# Altium PCB PCB2.PcbDoc
Units mm, origin at the board's own origin, x right, y up, seen from the top; angles counter-clockwise.
Board outline 90 x 77.44 mm, 2 copper layers (Top Layer, Bottom Layer); 78 components, 54 nets, 235 pads, 50 vias.
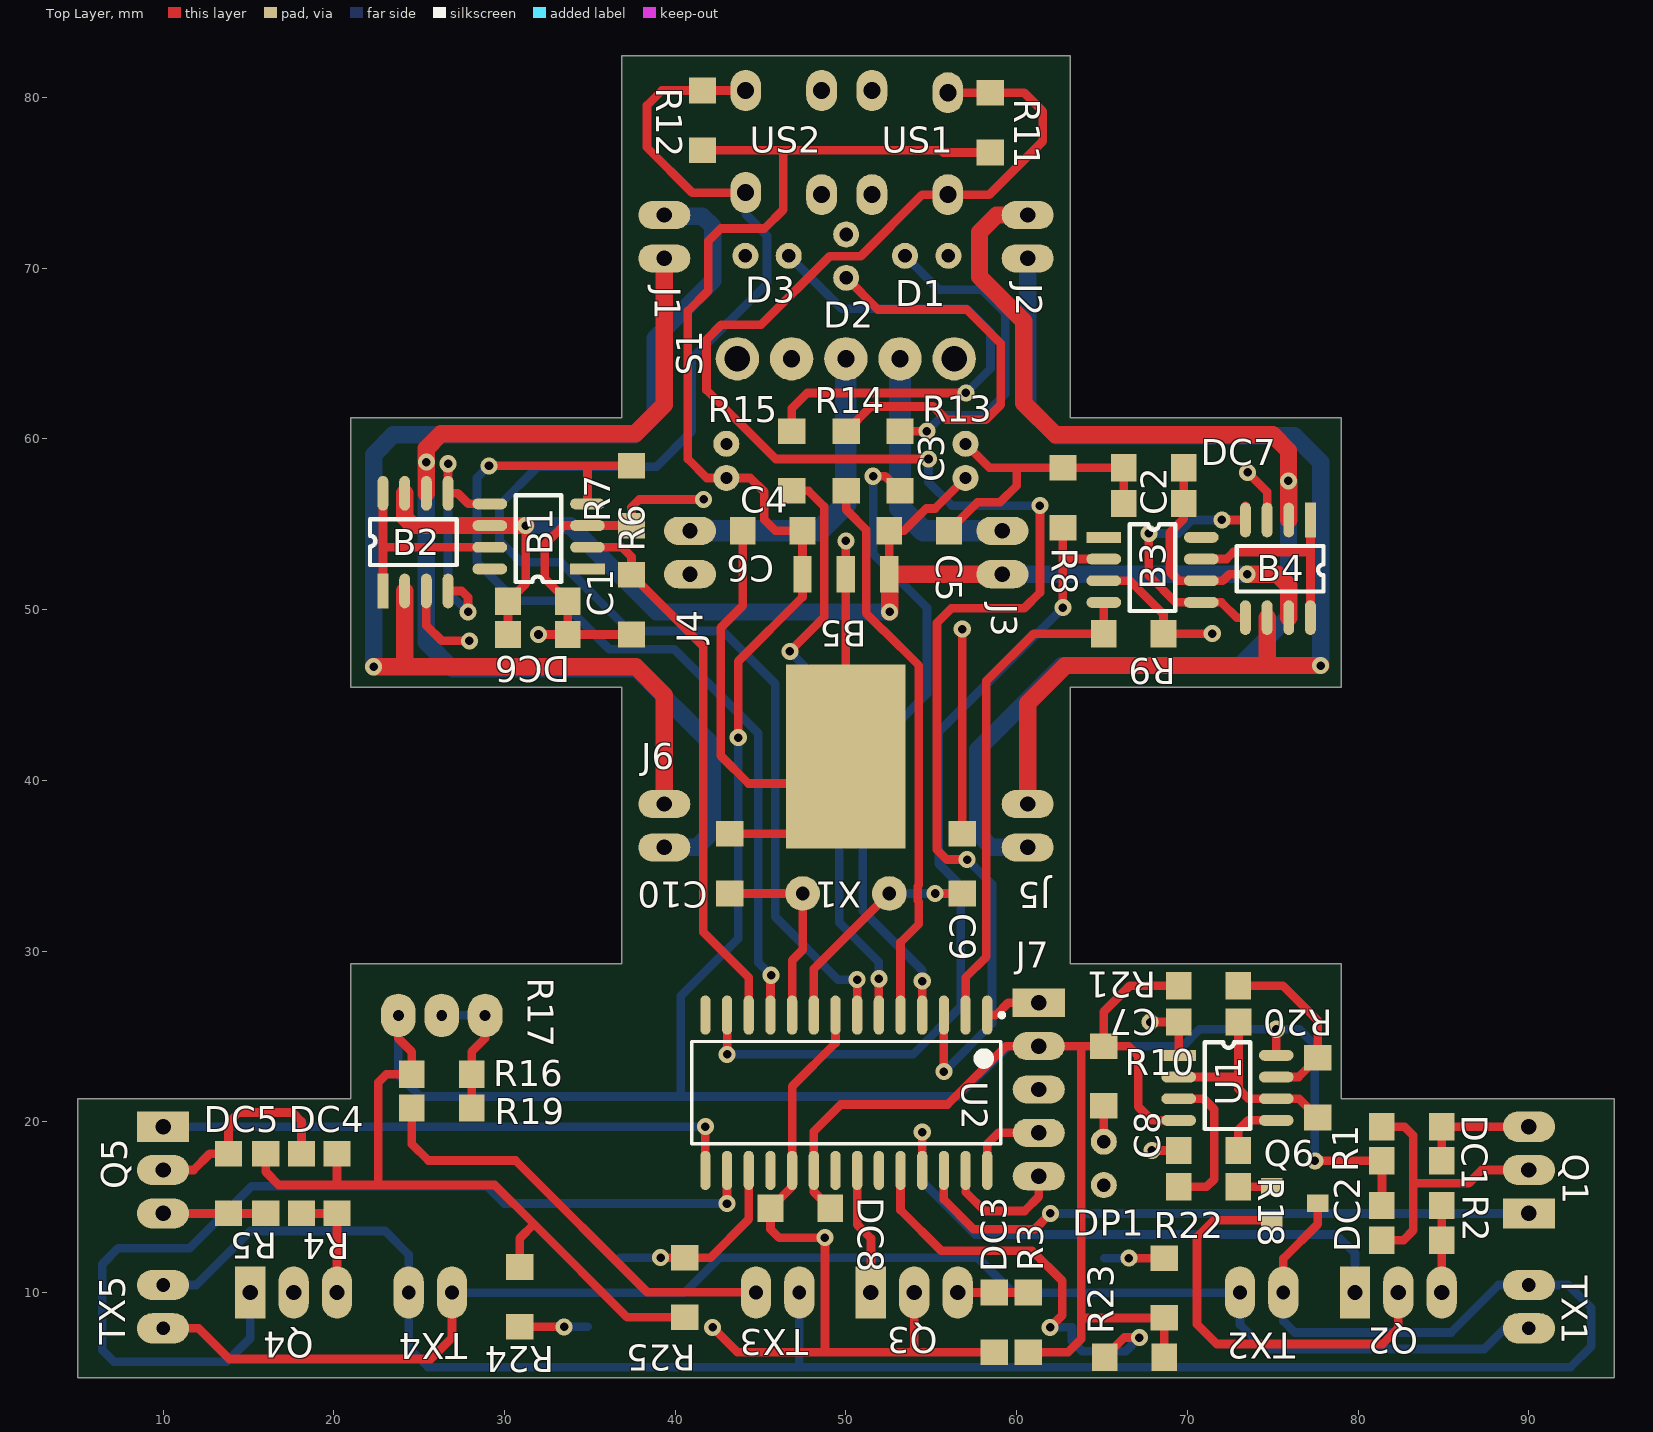
[diagram p0: Top Layer view]
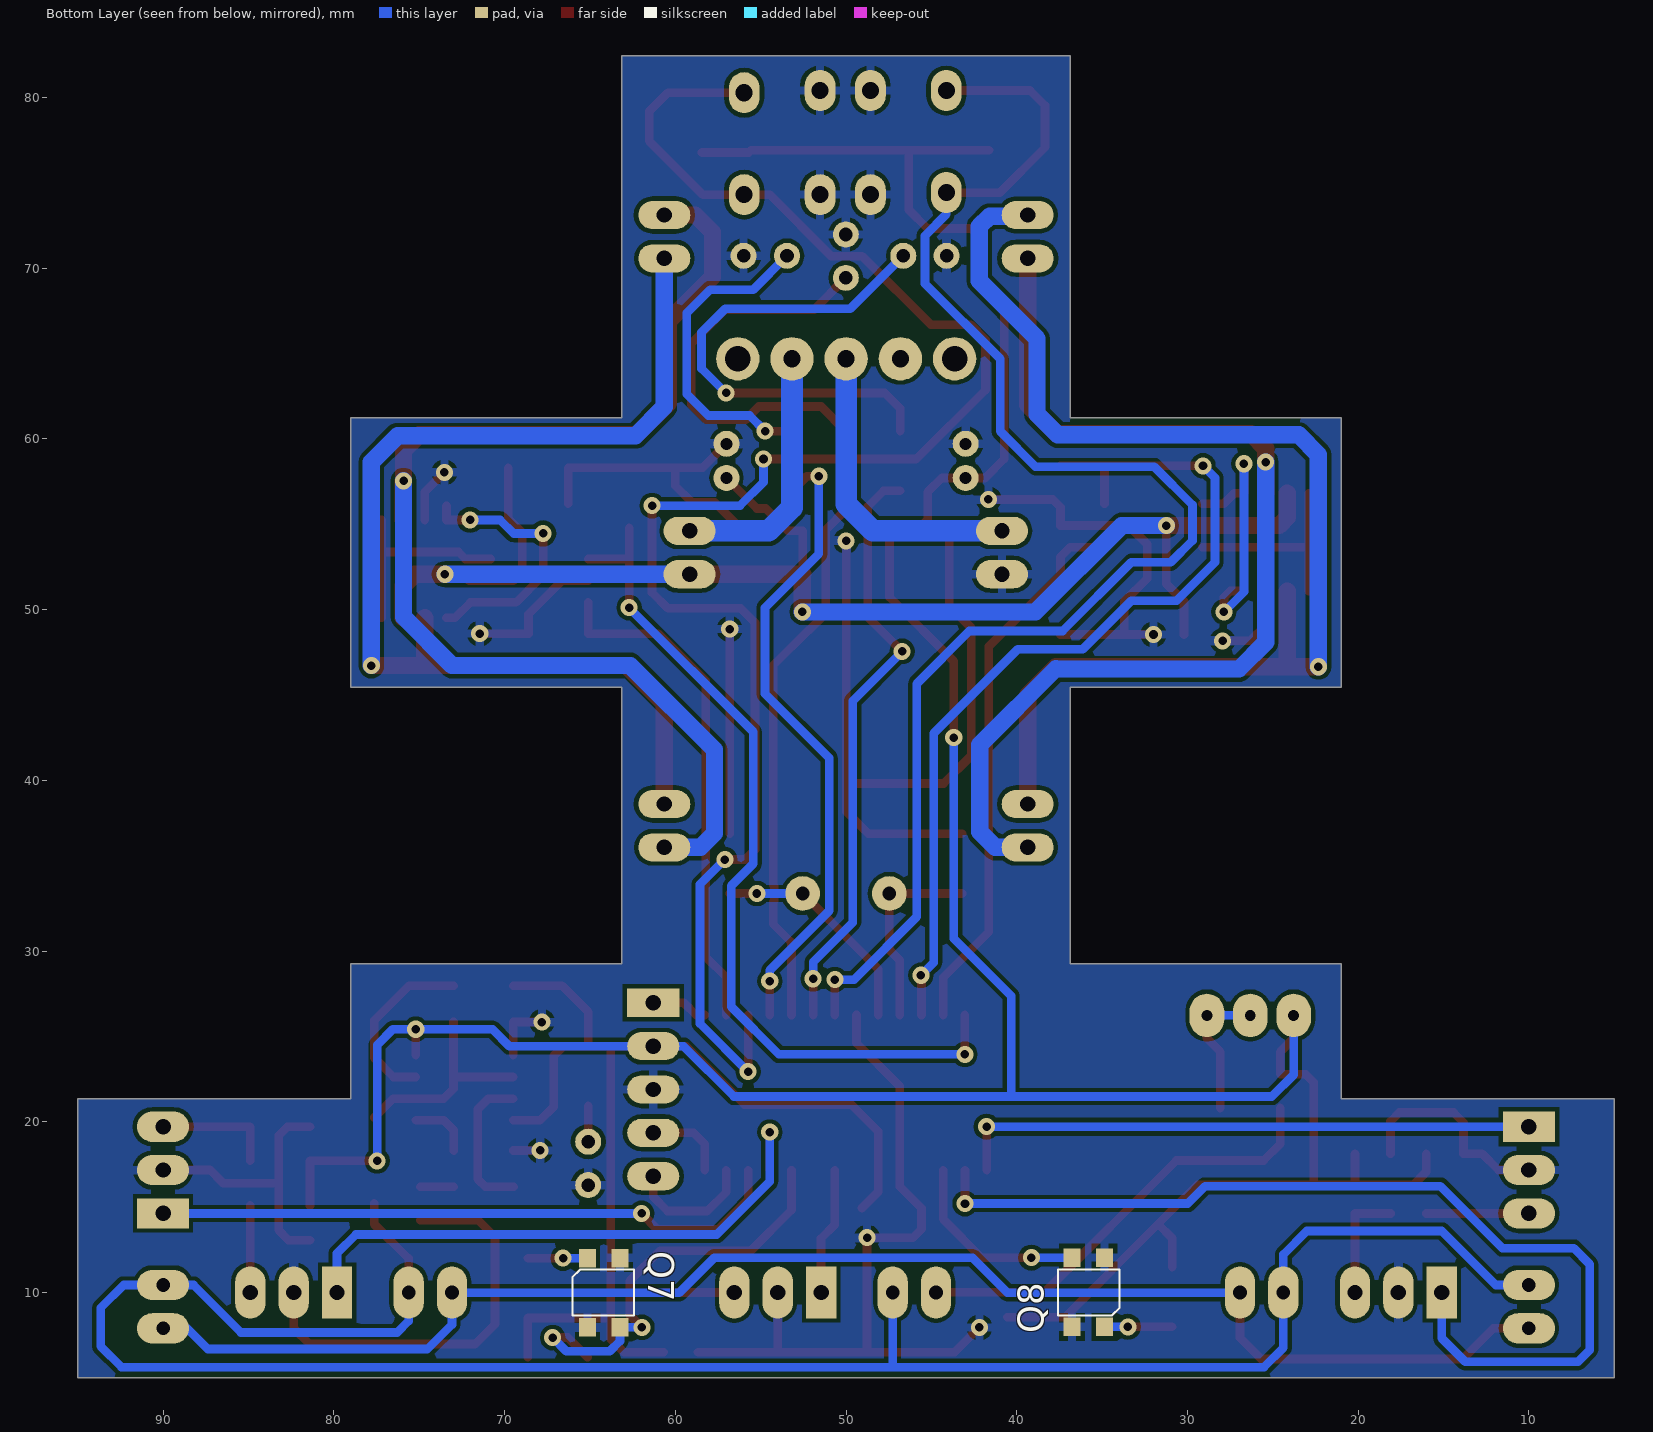
[diagram p1: Bottom Layer view, seen from below]
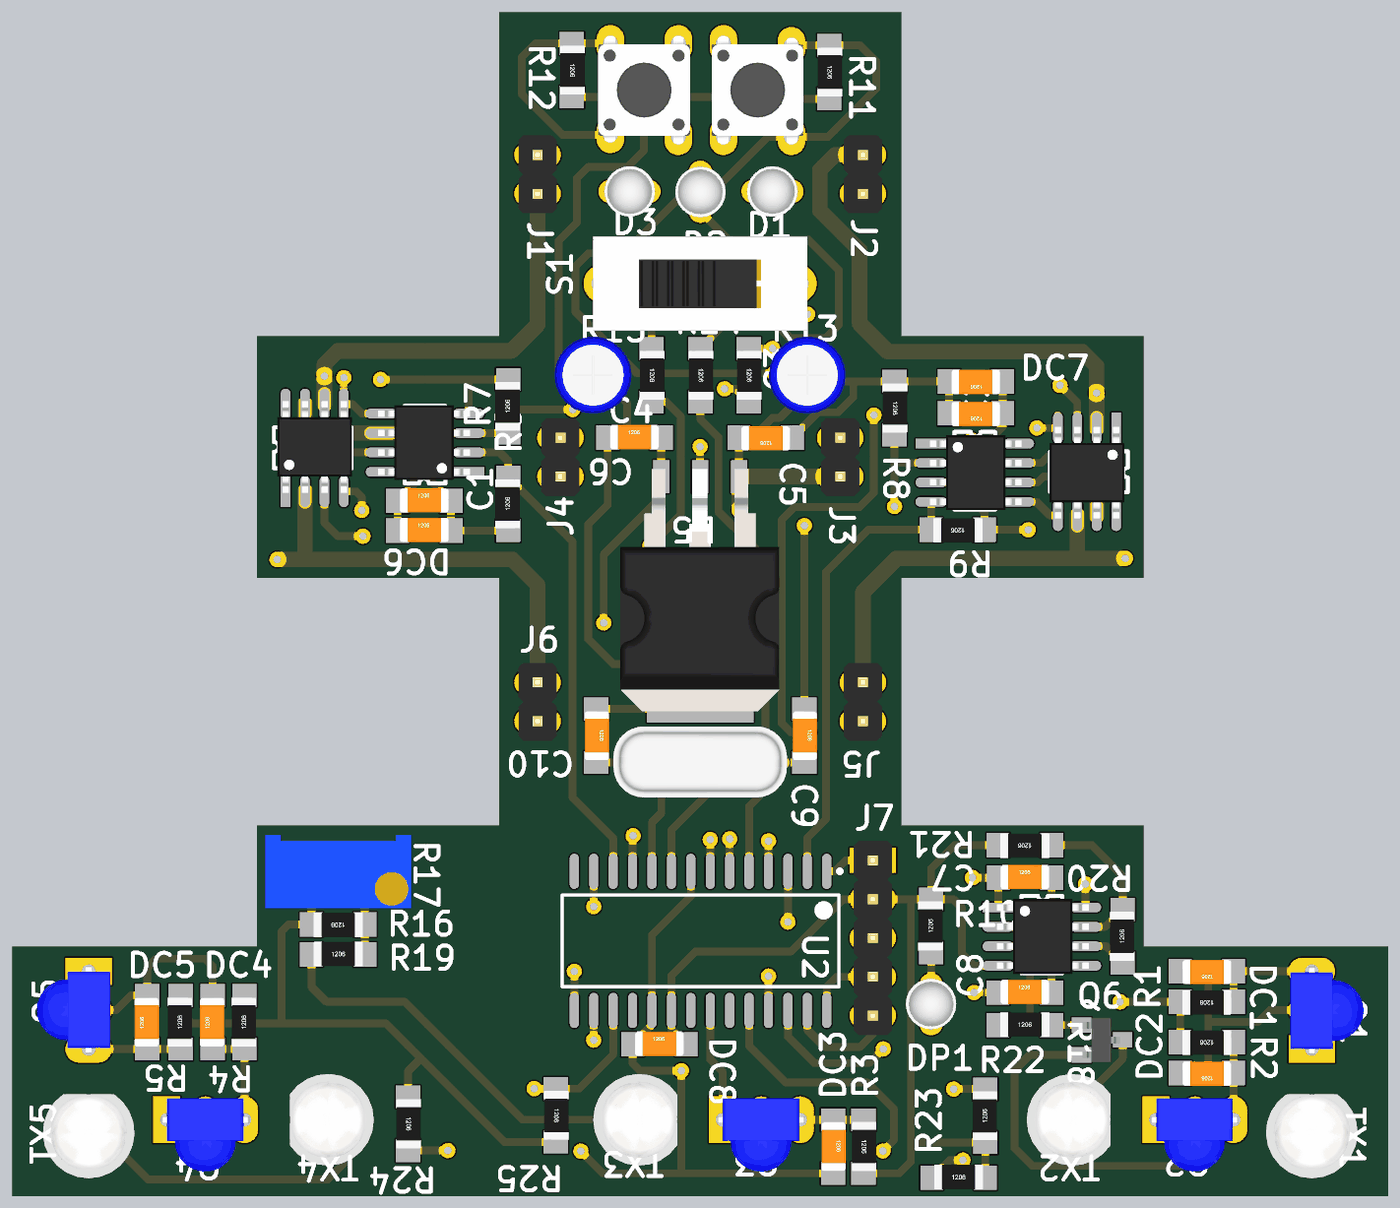
[diagram p2: 3D render of the assembled board from above, using the file's embedded part models]

## Layer stack, top to bottom
Top Solder: solder mask 0.0102, Solder Resist, Dk 3.5
Top Layer: signal copper 0.0356
Dielectric 1: dielectric 0.32, FR-4, Dk 4.8
Bottom Layer: signal copper 0.0356
Bottom Solder: solder mask 0.0102, Solder Resist, Dk 3.5

## Board outline
5,5 5,21.34 21,21.34 21,29.24 36.86,29.24 36.86,45.44 21,45.44 21,61.24 36.86,61.24 36.86,82.44 63.14,82.44 63.14,61.24 79,61.24 79,45.44 63.14,45.44 63.14,29.24 79,29.24 79,21.34 95,21.34 95,5

## Design rules (kind name [scope] priority, off if disabled: settings)
Clearance [All] p1: gap=0.254
HoleSize [All] p1: absolutevalues=TRUE maxlimit=6.3 minlimit=0.2 maxpercent=80.000 minpercent=20.000
MinimumAnnularRing [All] p1: minimumring=0.076
PlaneConnect [All] p1: planeconnectstyle=Relief reliefexpansion=0.508 reliefentries=4 reliefconductorwidth=0.508 reliefairgap=0.254
PolygonConnect [All] p1: connectstyle=Relief reliefconductorwidth=0.508 reliefentries=4 polygonreliefangle="90 Angle" airgapwidth=0.254
RoutingVias [All] p1: holewidth=0.5 width=1 viastyle="Through Hole" minholewidth=0.2 minwidth=0.45 maxholewidth=1 maxwidth=1.27
SolderMaskExpansion [All] p1: expansion=0.102
Width [All] p1: maxlimit=1.27 minlimit=0.127 preferedwidth=0.508
28 further rules are at their usual default settings.

## Components (designator, comment, footprint, x,y, rotation, side; value= is the part's Value field where it differs from the comment)
B1 "IX4427" SOIC-8 40.316,52.38 r180 top
B2 "ZXMHC3F381N8" SOIC-8 22.88,45.629 r90 top
B3 "IX4427" SOIC-8 59.639,54.23 r0 top
B4 "ZXMHC3F381N8" SOIC-8 77.205,60.706 r270 top
B5 "LM2940" TO-263 49.99,44.444 r180 top
C1 "CAP-CER" C1206 31.95,50.48 r0 top
C2 "CAP-CER" C1206 68.025,56.21 r180 top
C3 "CAP-ELEC" CAP-ELEC-5x11x2mm 57,58.71 r90 top
C4 "CAP-ELEC" CAP-ELEC-5x11x2mm 42.99,58.71 r90 top
C5 "CAP-CER" C1206 54.28,54.61 r180 top
C6 "CAP-CER" C1206 45.7,54.61 r0 top
C7 "CAP-CER" C1206 71.24,25.84 r0 top
C8 "CAP-CER" C1206 71.23,18.32 r0 top
C9 "CAP-CER" C1206 56.81,35.12 r270 top
C10 "CAP-CER" C1206 43.2,35.12 r270 top
D1 "LED" LED-3MM-RED 54.725,70.72 r0 top
D2 "LED" LED-3MM-YELLOW 50.01,70.7 r90 top
D3 "LED" LED-3MM-GREEN 45.375,70.72 r180 top
DC1 "CAP-CER" C1206 83.14,19.71 r180 top
DC2 "CAP-CER" C1206 83.14,13.06 r180 top
DC3 "CAP-CER" C1206 58.69,8.25 r270 top
DC4 "CAP-CER" C1206 18.11,16.38 r90 top
DC5 "CAP-CER" C1206 13.83,16.38 r90 top
DC6 "CAP-CER" C1206 31.95,48.54 r0 top
DC7 "CAP-CER" C1206 68.025,58.3 r180 top
DC8 "CAP-CER" C1206 47.33,14.94 r0 top
DP1 "LED" LED-3MM-RED 65.1,17.56 r270 top
J1 "MOTOR DERECHO 1" "HEADER 1x2" 39.36,71.84 r0 top
J2 "MOTOR IZQUIERDO 1" "HEADER 1x2" 60.64,71.84 r0 top
J3 "BATERIA 1" "HEADER 1x2" 59.16,53.34 r180 top
J4 "BATERIA 2" "HEADER 1x2" 40.86,53.34 r0 top
J5 "MOTOR IZQUIERDO 2" "HEADER 1x2" 60.64,37.34 r180 top
J6 "MOTOR DERECHO 2" "HEADER 1x2" 39.36,37.34 r0 top
J7 "PICkit" "Header 1x5" 61.29,26.97 r0 top
Q1 "TSSP58038" TSSP58038 90,14.63 r180 top
Q2 "TSSP58038" TSSP58038 79.81,10 r90 top
Q3 "TSSP58038" TSSP58038 51.46,10 r90 top
Q4 "TSSP58038" TSSP58038 15.11,10 r90 top
Q5 "TSSP58038" TSSP58038 10,19.71 r0 top
Q6 "MMBT2222A" SOT-23 78.138,22.215 r270 top
Q7 "QRE1113GR" QRE1113GR 64.175,10 r270 bottom
Q8 "QRE1113GR" QRE1113GR 35.825,10 r90 bottom
R1 "RES" R1206 83.14,17.71 r180 top
R2 "RES" R1206 83.14,15.09 r180 top
R3 "RES" R1206 60.68,8.25 r270 top
R4 "RES" R1206 20.19,16.38 r90 top
R5 "RES" R1206 16.01,16.38 r90 top
R6 "RES" R1206 37.44,50.29 r90 top
R7 "RES" R1206 37.44,56.67 r90 top
R8 "RES" R1206 62.705,56.55 r270 top
R9 "RES" R1206 66.85,48.59 r180 top
R10 "RES" R1206 65.1,22.68 r90 top
R11 "RES" R1206 58.44,78.523 r270 top
R12 "RES" R1206 41.6,78.65 r270 top
R13 "RES" R1206 53.165,58.7 r270 top
R14 "RES" R1206 50.01,58.7 r270 top
R15 "RES" R1206 46.815,58.7 r270 top
R16 "RES" R1206 26.32,22.78 r180 top
R17 "POT" TRIMPOT 26.32,26.23 r180 top
R18 "RES" R1206 71.23,16.19 r0 top
R19 "RES" R1206 26.32,20.81 r0 top
R20 "RES" R1206 77.63,22 r90 top
R21 "RES" R1206 71.23,27.97 r180 top
R22 "RES" R1206 68.645,10.26 r90 top
R23 "RES" R1206 66.895,6.21 r0 top
R24 "RES" R1206 30.89,9.74 r270 top
R25 "RES" R1206 40.55,10.29 r270 top
S1 "SLIDE-SWITCH" SWITCH 49.99,64.69 r180 top
TX1 "LED" LED-5MM-CLEAR 90,9.17 r90 top
TX2 "LED" LED-5MM-CLEAR 74.35,10 r0 top
TX3 "LED" LED-5MM-CLEAR 46,10 r0 top
TX4 "LED" LED-5MM-CLEAR 25.65,10 r180 top
TX5 "LED" LED-5MM-CLEAR 10,9.17 r90 top
U1 "555" SOIC-8 64.024,23.89 r0 top
U2 "PIC18F2550" SOIC-SO28_N 50.02,21.7 r270 top
US1 "BUTTON" TACT_SWITCH-SMALL-4PIN 55.965,74.304 r90 top
US2 "BUTTON" TACT_SWITCH-SMALL-4PIN 44.125,80.4 r270 top
X1 "XTAL" HC-49/S 50,33.37 r0 top

## Footprints (in the part's own frame and the unit in brackets; to place one, negate y for a bottom-side part, rotate by r counter-clockwise, add the part's x,y. Pads: shape width x height; smd on the part's side, far side on the other; paste and mask are expansions set on the pad)
C1206 [mm]
  rect 1.5x1.6 smd: 1(-1.75,0) 2(1.75,0)
  body extent -1.6,-0.76 1.6,0.84, height 1.26
CAP-ELEC-5x11x2mm [mm]
  round 1.524 hole 0.7: 1(-1,0) 2(1,0)
  body extent -2.53,-2.53 2.52,2.53, height 11.53
HC-49/S [mil]
  round 80 hole 31.5: 1(-100,0) 2(100,0)
  body extent -223,-90 223,93, height 138
"HEADER 1x2" [mil]
  oval 120x65 hole 35.43: 1(0,50) 2(0,-50)
  body extent -49,-100 49,100, height 336
"Header 1x5" [mil]
  rect 120x65 hole 35.43: 1(0,0)
  oval 120x65 hole 35.43: 2(0,-100) 3(0,-200) 4(0,-300) 5(0,-400)
  body extent -49,-450 49,50, height 336
LED-3MM-GREEN [mil]
  round 60 hole 31.5: A(-50,0) K(50,0)
  body extent -66,-65 64,65, height 217
LED-3MM-RED [mil]
  round 60 hole 31.5: A(-50,0) K(50,0)
  body extent -66,-65 64,65, height 217
LED-3MM-YELLOW [mil]
  round 60 hole 31.5: A(-50,0) K(50,0)
  body extent -66,-65 64,65, height 217
LED-5MM-CLEAR [mil]
  oval 70x120 hole 31.5: A(-50,0) K(50,0)
  body extent -118,-118 98,118, height 346
QRE1113GR [mm]
  rect 1.1x1 smd: A(-2.01,-0.97) C(2.04,0.94) E(-2.01,0.94) K(2.04,-0.97)
  silkscreen extent -1.35,-1.85 1.35,1.75, body extent -2.4,-1.8 2.4,1.8, height 1.83
R1206 [mm]
  rect 1.5x1.6 smd: 1(-1.75,0) 2(1.75,0)
  body extent -1.6,-0.76 1.6,0.84, height 0.68
SOIC-8 [mil]
  rect 80x25 smd: 1(215,0)
  oval 80x25 smd: 2(215,-50) 3(215,-100) 4(215,-150) 5(440,-150) 6(440,-100) 7(440,-50) 8(440,0)
  silkscreen extent 275,-170 380,30, body extent 212,-171 448,21, height 69
SOIC-SO28_N [mm] "SOIC, 28-Leads, Body 17.9x7.5mm, Pitch 1.27mm, IPC Medium Density"
  oval 2.3x0.6 smd: 1(-4.55,8.255) 2(-4.55,6.985) 3(-4.55,5.715) 4(-4.55,4.445) 5(-4.55,3.175) 6(-4.55,1.905) 7(-4.55,0.635) 8(-4.55,-0.635) 9(-4.55,-1.905) 10(-4.55,-3.175) 11(-4.55,-4.445) 12(-4.55,-5.715) 13(-4.55,-6.985) 14(-4.55,-8.255) 15(4.55,-8.255) 16(4.55,-6.985) 17(4.55,-5.715) 18(4.55,-4.445) 19(4.55,-3.175) 20(4.55,-1.905) 21(4.55,-0.635) 22(4.55,0.635) 23(4.55,1.905) 24(4.55,3.175) 25(4.55,4.445) 26(4.55,5.715) 27(4.55,6.985) 28(4.55,8.255)
  silkscreen extent -4.67,-9.05 3,9.23, body extent -3.8,-9.06 3.8,9.06, height 2.65
SOT-23 [mil]
  rect 40x50 smd: B(237.2,-125.99) C(275,-20) E(313.98,-125.99)
  body extent 218,-124 333,-27, height 38
SWITCH [mm]
  round 2.54 hole 1: 1(-3.175,0) 2(0,0) 3(3.175,0)
  round 2.54 hole 1.5: 4(-6.35,0) 4(6.35,0)
  body extent -7,-3.1 7,3.1, height 9.65
TACT_SWITCH-SMALL-4PIN [mm]
  oval 2.4x1.8 hole 1: 1(0,4.445) 1(6.096,4.445) 2(0,0) 2(5.969,0)
  body extent -0.94,-0.79 7.04,5.21, height 5.15
TO-263 [mil]
  rect 42x85 smd: 1(-100,-300.25) 2(0,-300.25) 3(100,-300.25)
  rect 275x425 smd: 2(0,120.25)
  body extent -204,-320 205,304, height 181
TRIMPOT [mil]
  oval 80x100 hole 25: 1(-100,0) 2(0,0) 3(100,0)
  body extent -188,-94 188,94, height 455
TSSP58038 [mil]
  rect 120x70 hole 35.43: 1(0,0)
  oval 120x70 hole 35.43: 2(0,-100) 3(0,-200)
  body extent -134,-213 55,15, height 337

## Part data
B1 B3: library part 4427
J1 J2 J3 J4 J5 J6: library part "Header 1x2"
Q6: library part NPN

## Via types
v1: diameter 1, hole 0.5, Top Layer to Bottom Layer, 50 vias

## Nets (pads, with @x,y where several pads share a name; then routed paths per layer and width w, separated by ;. In a path a pad name is that pad's centre, name@x,y a point inside that pad or via, vN(x,y) a via of type N, cw(c..) or ccw(c..) an arc to the next point about the centre after c; other vN are vias at no path point)
38K: R18.1 U1.3 | length 8.7
  Top Layer w0.508: R18.1 71.12,16.19 71.57,16.64 71.57,20.73 70.95,21.35 U1.3
BTN1: R11.1 U2.3 US1.2 | length 103
  Top Layer w0.508: v1(54.832,58.818) 45.88,58.818 41.834,62.865 41.834,65.811 42.697,66.675 45.025,66.675 49.05,70.7 50.863,70.7 54.458,74.295 US1.2@55.965,74.295 ; v1(55.735,22.936) U2.3 ; US1.2@55.965,74.304 US1.2@55.965,74.295 ; US1.2@55.965,80.273 R11.1 60.437,80.273 61.52,79.19 61.52,77.43 58.385,74.295 US1.2@55.965,74.295 ; v1(57.099,35.357) 55.905,35.357 55.33,35.932 55.33,49.23 56.18,50.08 60.44,50.08 61.36,51 v1(61.36,56.09)
  Bottom Layer w0.508: v1(54.832,58.818) 54.832,57.462 56.204,56.09 v1(61.36,56.09) ; v1(55.735,22.936) 58.55,25.751 58.55,33.906 v1(57.099,35.357)
BTN2: R12.1 U2.7 US2.2 | length 88.6
  Top Layer w0.508: US2.2@44.125,74.431 44.125,74.422 40.988,74.422 38.34,77.07 38.34,79.52 39.22,80.4 R12.1 US2.2@44.125,80.4 ; U2.7 v1(50.655,28.325)
  Bottom Layer w0.508: US2.2@44.125,74.431 44.125,73.152 45.375,71.902 45.375,69.088 40.97,64.683 40.97,60.44 38.9,58.37 31.95,58.37 29.7,56.12 29.7,54.05 30.98,52.77 33.29,52.77 37.32,48.74 42.776,48.74 45.86,45.656 45.86,32 49.535,28.325 v1(50.655,28.325)
CNY1: Q7.C R23.1 U2.24 | length 25.6
  Top Layer w0.508: U2.24 53.195,14.835 55.58,12.45 60.9,12.45 62.66,10.69 62.66,8.669 v1(61.951,7.96) ; R23.1 66.295,7.36 v1(67.179,7.36)
  Bottom Layer w0.508: v1(61.951,7.96) Q7.C 63.235,7.155 63.83,6.56 66.379,6.56 v1(67.179,7.36)
CNY2: Q8.C R25.1 U2.17 | length 11.3
  Top Layer w0.508: v1(39.141,12.04) R25.1 42.064,12.04 44.305,14.282 U2.17
  Bottom Layer w0.508: Q8.C v1(39.141,12.04)
GND: B1.3 B2.3 B3.3 B4.3 B5.2 C1.2 C2.2 C3.2 C4.2 C5.1 C6.1 C7.1 C8.1 C9.1 C10.1 D1.K D2.K D3.K DC1.2 DC2.2 DC3.2 DC4.2 DC5.2 DC6.2 DC7.2 DC8.1 DP1.K J4.2 J7.3 Q1.2 Q2.2 Q3.2 Q4.2 Q5.2 Q6.E Q7.E Q7.K Q8.E Q8.K R6.1 R7.1 R8.1 R9.1 U1.1 U2.8 U2.19 US1.1 US2.1 | length 217.8
  Top Layer w0.508: Q5.2 11.778,17.17 12.738,18.13 DC5.2 13.83,19.95 14.42,20.54 17.59,20.54 18.11,20.02 DC4.2 ; B2.3 25.42,49.07 26.32,48.17 v1(27.94,48.17) ; v1(31.99,48.54) DC6.2 ; R6.1 DC6.2 ; v1(41.66,56.45) 37.89,56.45 37.44,56 R7.1 B1.3 33.46,54.92 32.36,53.82 32.36,51.82 C1.2 DC6.2 ; v1(42.189,7.95) 43.64,6.5 48.768,6.5 ; C10.1 48.684,36.87 49.99,38.176 B5.2@49.99,39.81 ; C6.1 43.95,50.224 42.665,48.939 42.665,41.435 44.29,39.81 B5.2@49.99,39.81 ; U2.8 49.385,24.613 46.845,22.073 U2.19 46.845,16.205 DC8.1 45.58,13.71 46.082,13.208 v1(48.768,13.208) 48.768,6.5 ; v1(49.99,54.026) 49.99,52.07 49.99,41.389 B5.2@49.99,39.81 ; Q3.2 54,6.5 ; C5.1 57.7,56.28 59.02,56.28 60.01,57.27 60.01,58.3 ; C9.1 v1(56.81,48.86) ; C3.2 58.41,58.3 60.01,58.3 ; DC3.2 54,6.5 ; B3.3 66.64,51.69 68.6,49.73 R9.1 v1(71.45,48.59) ; C2.2 DC7.2 R8.1 60.01,58.3 ; v1(67.81,25.84) 69.48,25.84 69.485,25.835 U1.1 ; v1(67.911,18.32) C8.1 ; v1(73.522,58.039) 74.665,56.896 B4.3 ; Q6.E 71.55,14.24 70.56,13.25 70.56,8.14 71.72,6.98 81.42,6.98 82.35,7.91 Q2.2 ; DC2.2 82.65,13.06 83.23,13.64 83.23,16.4 ; DC1.2 82.71,19.71 83.23,19.19 83.23,16.4 ; Q1.2 87.24,17.17 86.47,16.4 83.23,16.4 ; 48.768,6.5 54,6.5
IR1: Q1.1 U2.26 | length 37.1
  Top Layer w0.508: U2.26 55.735,15.445 57.47,13.71 61.05,13.71 v1(61.97,14.63)
  Bottom Layer w0.508: v1(61.97,14.63) Q1.1
IR2: Q2.1 U2.25 | length 34.5
  Top Layer w0.508: U2.25 v1(54.465,19.395)
  Bottom Layer w0.508: v1(54.465,19.395) 54.465,16.505 57.57,13.4 78.704,13.4 79.81,12.294 Q2.1
IR3: Q3.1 U2.22 | length 7.5
  Top Layer w0.508: U2.22 50.655,13.962 51.46,13.157 Q3.1
IR4: Q4.1 U2.16 | length 58.1
  Top Layer w0.508: v1(43.03,15.21) 43.03,17.145 U2.16
  Bottom Layer w0.508: Q4.1 15.11,7.315 13.735,5.94 7.13,5.94 6.44,6.63 6.44,11.66 7.38,12.6 11.56,12.6 15.191,16.231 28.961,16.231 29.982,15.21 v1(43.03,15.21)
IR5: Q5.1 U2.15 | length 34.3
  Top Layer w0.508: U2.15 v1(41.765,19.71)
  Bottom Layer w0.508: Q5.1 v1(41.765,19.71)
LED1: R13.2 U2.4 | length 37.8
  Top Layer w0.508: v1(51.587,57.81) 52.305,57.81 R13.2 ; U2.4 v1(54.465,28.237)
  Bottom Layer w0.508: v1(51.587,57.81) 51.587,53.263 54.74,50.11 54.74,45.064 50.978,41.302 50.978,32.362 54.465,28.875 v1(54.465,28.237)
LED2: R14.2 U2.5 | length 33
  Top Layer w0.508: R14.2 50.01,55.84 51.19,54.66 51.19,49.775 52.172,48.793 52.197,48.793 54.27,46.72 54.27,33.846 54.212,33.788 54.212,32.952 54.27,32.894 54.27,31.58 53.195,30.505 U2.5
LED3: R15.2 U2.6 | length 35.1
  Top Layer w0.508: v1(46.711,47.549) 48.717,49.555 48.717,56.032 47.8,56.95 R15.2 ; U2.6 v1(51.925,28.375)
  Bottom Layer w0.508: v1(46.711,47.549) 49.61,44.649 49.61,31.67 51.925,29.355 v1(51.925,28.375)
MD_DIR: B1.4 R7.2 U2.11 | length 53.9
  Top Layer w0.508: v1(29.09,58.42) 34.855,58.42 ; B1.4 34.855,58.42 ; R7.2 34.855,58.42 ; U2.11 v1@45.575,28.58
  Bottom Layer w0.508: v1(29.09,58.42) 28.39,57.72 28.39,52.77 30.64,50.52 33.29,50.52 36.134,47.676 39.932,47.676 44.86,42.748 44.86,29.33 v1(45.61,28.58)
MD_PWM: B1.2 R6.2 U2.12 | length 32.5
  Top Layer w0.508: B1.2 36.88,53.65 37.44,53.09 R6.2 41.64,47.84 41.64,31.113 44.305,28.448 U2.12
MI_DIR: B3.4 R9.2 U2.2 | length 29.9
  Top Layer w0.508: U2.2 57.005,28.448 58.224,29.667 58.224,45.824 60.99,48.59 R9.2 B3.4
MI_PWM: B3.2 R8.2 U2.13 | length 51.2
  Top Layer w0.508: v1(43.035,23.944) U2.13 ; v1(62.705,50.114) 62.705,52.96 ; R8.2 62.705,52.96 ; B3.2 62.705,52.96
  Bottom Layer w0.508: v1(43.035,23.944) 53.924,23.944 56.718,26.738 56.718,33.822 55.43,35.11 55.43,42.839 v1(62.705,50.114)
NetB1_5: B1.5 B2.4 B2.5 | length 15.8
  Top Layer w0.508: B2.4 27.49,51.09 27.864,50.716 v1(27.864,49.86) ; v1(26.69,58.54) B2.5 27.265,56.805 27.88,56.19 B1.5
  Bottom Layer w0.508: v1(26.69,58.54) 26.69,51.034 v1(27.864,49.86)
NetB1_7: B1.7 B2.1 B2.8 | length 12
  Top Layer w0.508: B2.1 22.88,53.65 ; B2.8 22.88,53.65 ; B1.7 22.88,53.65
NetB2_2: B2.2 J1.1 J6.1 | length 73.9
  Top Layer w1.016: v1(22.33,46.65) 24.15,46.65 ; B2.2 24.15,46.65 ; J6.1 39.36,44.99 37.7,46.65 24.15,46.65
  Bottom Layer w1.016: v1(22.33,46.65) 22.33,59.07 23.49,60.23 37.6,60.23 38.81,61.44 38.81,65.87 42.19,69.25 42.19,72.44 41.59,73.04 J1.1@39.36,73.04
NetB2_6: B2.6 J1.2 J6.2 | length 64.3
  Top Layer w1.016: B2.6 v1(25.42,58.64) 25.42,59.43 26.28,60.29 37.65,60.29 39.36,62 J1.2
  Bottom Layer w1.016: v1(25.42,58.64) 25.42,48.08 26.95,46.55 26.984,46.516 37.666,46.516 37.7,46.55 42.17,42.08 42.17,36.98 41.26,36.07 J6.2
NetB3_5: B3.5 B4.4 B4.5 | length 16
  Top Layer w0.508: v1(67.742,54.458) 67.742,51.998 69.32,50.42 B3.5 71.99,50.42 72.88,49.53 B4.5 ; v1(72.02,55.25) 72.025,55.245 B4.4 B4.4@73.395,56.083
  Bottom Layer w0.508: v1(67.742,54.458) 69.468,54.458 70.26,55.25 v1(72.02,55.25)
NetB3_7: B3.7 B4.1 B4.8 | length 12.3
  Top Layer w0.508: B3.7 72.29,52.96 72.7,53.37 77.205,53.37 ; B4.8 77.205,53.37 ; B4.1 77.205,53.37
NetB4_2: B4.2 J2.1 J5.1 | length 72.6
  Top Layer w1.016: J2.1 58.82,73.11 57.82,72.11 57.82,69.49 60.42,66.89 60.42,62.09 62.27,60.24 74.99,60.24 75.915,59.315 v1(75.915,57.54) ; B4.2 v1@75.935,57.52
  Bottom Layer w1.016: J5.1 58.52,36.07 57.7,36.89 57.7,41.78 62.64,46.72 73.07,46.72 75.915,49.565 v1(75.915,57.54)
NetB4_6: B4.6 J2.2 J5.2 | length 78.2
  Top Layer w0.508: 62.418,46.406 62.797,46.785 74.665,46.785
  Top Layer w1.016: J5.2 60.64,44.51 62.85,46.72 v1(77.8,46.72) ; 74.665,46.785 B4.6
  Bottom Layer w1.016: J2.2 60.64,61.87 62.33,60.18 76.26,60.18 77.8,58.64 v1(77.8,46.72)
NetC7_2: C7.2 R20.1 U1.2 U1.6 | length 12.8
  Top Layer w0.508: U1.2 72.99,22.62 ; C7.2 72.99,22.62 ; R20.1 76.53,21.35 U1.6 73.57,21.35 72.99,21.93 72.99,22.62
NetC8_2: C8.2 U1.5 | length 3.6
  Top Layer w0.508: C8.2 72.98,19.507 73.553,20.08 U1.5
NetD1_A: D1.A R13.1 | length 19.1
  Top Layer w0.508: R13.1 v1(54.735,60.45)
  Bottom Layer w0.508: D1.A 55.435,68.74 57.96,68.74 59.33,67.37 59.33,62.629 58.071,61.37 55.655,61.37 v1(54.735,60.45)
NetD2_A: D2.A R14.1 | length 24.6
  Top Layer w0.508: R14.1 51.45,61.89 55.11,61.89 55.88,61.12 58.18,61.12 59.06,62 59.06,65.59 57.07,67.58 51.86,67.58 D2.A
NetD3_A: D3.A R15.1 | length 29.7
  Top Layer w0.508: R15.1 46.815,61.773 47.729,62.687 v1(57.023,62.687)
  Bottom Layer w0.508: D3.A 49.745,67.62 57.08,67.62 58.46,66.24 58.46,64.124 v1(57.023,62.687)
NetDC1_1: DC1.1 Q1.3 R1.1 | length 7.1
  Top Layer w0.508: R1.1 DC1.1 Q1.3
NetDC2_1: DC2.1 Q2.3 R2.1 | length 5.1
  Top Layer w0.508: Q2.3 DC2.1 R2.1
NetDC3_1: DC3.1 Q3.3 R3.1 | length 4.1
  Top Layer w0.508: Q3.3 DC3.1 R3.1
NetDC4_1: DC4.1 Q4.3 R4.1 | length 6.7
  Top Layer w0.508: DC4.1 R4.1 Q4.3
NetDC5_1: DC5.1 Q5.3 R5.1 | length 6
  Top Layer w0.508: Q5.3 DC5.1 R5.1
NetDP1_A: DP1.A R10.1 | length 2.1
  Top Layer w0.508: DP1.A 65.1,19.863 R10.1
NetJ3_2: J3.2 S1.1 | length 15.3
  Bottom Layer w1.27: S1.1 53.165,55.965 54.52,54.61 J3.2
NetJ4_1: J4.1 S1.2 | length 18.3
  Bottom Layer w1.27: J4.1 48.42,54.61 49.99,56.18 S1.2
NetQ6_B: Q6.B R18.2 | length 2
  Top Layer w0.508: R18.2 Q6.B
NetQ6_C: Q6.C TX1.K TX2.K TX3.K TX4.K TX5.K | length 126.3
  Top Layer w0.508: TX2.K 75.62,11.99 77.63,14 Q6.C
  Bottom Layer w0.508: TX5.K 11.939,10.44 15.099,13.6 23.01,13.6 24.38,12.23 TX4.K 24.38,6.77 25.52,5.63 47.27,5.63 ; TX3.K 47.27,5.63 ; TX2.K 75.62,8.327 76.287,7.66 85.442,7.66 88.222,10.44 TX1.K 92.31,10.44 93.66,9.09 93.66,6.85 92.44,5.63 47.27,5.63
NetQ7_A: Q7.A R22.2 | length 3.5
  Top Layer w0.508: v1(66.573,12.01) R22.2
  Bottom Layer w0.508: Q7.A v1(66.573,12.01)
NetQ8_A: Q8.A R24.2 | length 4
  Top Layer w0.508: R24.2 v1(33.492,7.99)
  Bottom Layer w0.508: v1(33.492,7.99) Q8.A
NetR16_1: R16.1 R17.1 R17.2 R19.2 | length 8.3
  Top Layer w0.508: R19.2 R16.1 28.07,24.105 28.86,24.895 R17.1
  Bottom Layer w0.508: R17.2 R17.1
NetR19_1: R19.1 TX3.A | length 25.9
  Top Layer w0.508: R19.1 24.57,18.7 25.54,17.73 30.64,17.73 38.362,10.008 44.73,10.008 TX3.A
NetR20_2: R20.2 R21.1 U1.7 | length 10.6
  Top Layer w0.508: R21.1 75.59,27.97 77.63,25.93 R20.2 76.5,22.62 U1.7
NetTX1_A: TX1.A TX2.A TX4.A TX5.A | length 88.6
  Top Layer w0.508: TX5.A 12.08,7.9 13.88,6.1 25.67,6.1 26.92,7.35 TX4.A
  Bottom Layer w0.508: TX4.A 26.92,9.982 40.538,9.982 42.593,12.037 57.713,12.037 59.768,9.982 TX2.A@73.08,9.982 ; TX2.A TX2.A@73.08,9.982 ; TX1.A 88.595,7.9 87.385,6.69 74.518,6.69 73.08,8.128 TX2.A@73.08,9.982
PGC: J7.5 U2.27 | length 7.6
  Top Layer w0.508: U2.27 57.005,15.885 58.12,14.77 60.46,14.77 61.29,15.6 J7.5
PGD: J7.4 U2.28 | length 4.8
  Top Layer w0.508: U2.28 58.275,18.697 58.928,19.35 J7.4
VBAT: B1.6 B2.7 B3.6 B4.7 B5.1 C1.1 C2.1 C3.1 C5.2 DC6.1 DC7.1 J3.1 | length 86.3
  Top Layer w0.508: DC6.1 C1.1 31.24,51.52 v1(31.24,54.92) ; B5.1 C5.2 53.4,54.61 54.708,55.918 55.208,55.918 C3.1 ; DC7.1 C2.1 69.775,55.315 68.963,54.503 68.963,52.221 69.494,51.69 B3.6 72.06,51.69 72.44,52.07 v1(73.49,52.07)
  Top Layer w1.016: B2.7 24.15,55.39 24.62,54.92 B1.6 v1(31.24,54.92) ; v1(52.56,49.86) 52.56,52.04 B5.1 J3.1 ; v1(73.49,52.07) 75.27,52.07 75.935,51.405 B4.7
  Bottom Layer w1.016: v1(31.24,54.92) 33.84,54.92 38.9,49.86 v1(52.56,49.86) ; J3.1 v1(73.49,52.07)
VCC: B5.3 C4.1 C6.2 DC8.2 J7.2 R1.2 R2.2 R3.2 R4.2 R5.2 R10.2 R11.2 R12.2 R16.2 R17.3 R21.2 R22.1 R23.2 R24.1 R25.2 U1.4 U1.8 U2.20 | length 271.2
  Top Layer w0.508: R5.2 16.01,17.069 16.779,16.3 20.19,16.3 ; R4.2 20.19,16.3 ; R17.3 23.78,24.894 24.57,24.105 R16.2 23.09,22.78 22.61,22.3 22.61,16.3 ; R24.1 30.89,13.18 31.72,14.01 ; R25.2 37.189,8.54 31.72,14.01 ; R12.2 46.32,76.9 ; v1(43.688,42.494) 43.688,46.975 47.45,50.736 B5.3 C6.2 45.872,54.61 45.212,55.27 45.212,56.896 44.398,57.71 C4.1 41.85,57.71 40.74,58.82 40.74,67.49 41.93,68.68 41.93,71.59 42.66,72.32 45.22,72.32 46.32,73.42 46.32,76.9 ; DC8.2 48.115,15.905 U2.20 48.115,19.435 49.69,21.01 55.95,21.01 59.37,24.43 J7.2 63.779,24.43 ; R11.2 55.687,76.773 55.56,76.9 46.32,76.9 ; R3.2 63,6.5 63.779,7.279 63.779,8.51 ; R23.2 R22.1 63.779,8.51 ; R21.2 66.62,27.97 65.1,26.45 R10.2 ; U1.4 67.92,20.08 67.12,20.88 67.12,23.86 66.55,24.43 R10.2 ; U1.8 v1(75.2,25.42) ; v1(77.464,17.71) R1.2 R2.2 ; 20.19,16.3 22.61,16.3 ; 22.61,16.3 29.429,16.3 31.72,14.01 ; 63.779,8.51 63.779,24.43 ; 63.779,24.43 R10.2
  Bottom Layer w0.508: R17.3 23.78,22.758 25.058,21.48 40.33,21.48 ; v1(43.688,42.494) 43.688,30.734 40.33,27.376 40.33,21.48 ; v1(77.464,17.71) 77.464,24.496 76.54,25.42 v1(75.2,25.42) 70.71,25.42 69.72,24.43 J7.2 59.512,24.43 56.562,21.48 40.33,21.48
VPP: J7.1 U2.1 | length 3.3
  Top Layer w0.508: U2.1 58.78,26.25 59.5,26.97 J7.1
XTAL1: C9.2 U2.9 X1.2 | length 13.2
  Top Layer w0.508: U2.9 48.115,28.945 X1.2 ; v1(55.22,33.37) C9.2
  Bottom Layer w0.508: X1.2@52.53,33.36 X1.2 v1(55.22,33.37)
XTAL2: C10.2 U2.10 X1.1 | length 11.6
  Top Layer w0.508: C10.2 X1.1 47.46,30.074 46.845,29.459 U2.10
pads on no net: B1.1 B1.8 B3.1 B3.8 S1.3 S1.4 U2.14 U2.18 U2.21 U2.23

## Polygon pours and split planes (outlines as drawn)
GND on Bottom Layer "Top Layer-No Net" (solid, remove dead copper, pour order 2): 5,5 5,21.34 21,21.34 21,29.24 36.86,29.24 36.86,45.44 21,45.44 21,61.24 36.86,61.24 36.86,82.44 63.14,82.44 63.14,61.24 79,61.24 79,45.44 63.14,45.44 63.14,29.24 79,29.24 79,21.34 95,21.34 95,5

## Silkscreen, mask and mechanical layers (free items; w line width, h text height)
Mechanical 1:
  the board outline again, w0.254